# Altium PCB FinalPCB.PcbDoc (part 1 of 2)
Units mil, origin at the board's own origin, x right, y up, seen from the top; angles counter-clockwise.
Board outline 1128 x 1200 mil, 4 copper layers (Top Layer, Layer 1, Layer 2, Bottom Layer), stack 23.756 mil thick; 37 components, 46 nets, 236 pads, 59 vias.
Unrouted connection lines stored in the file: 12.
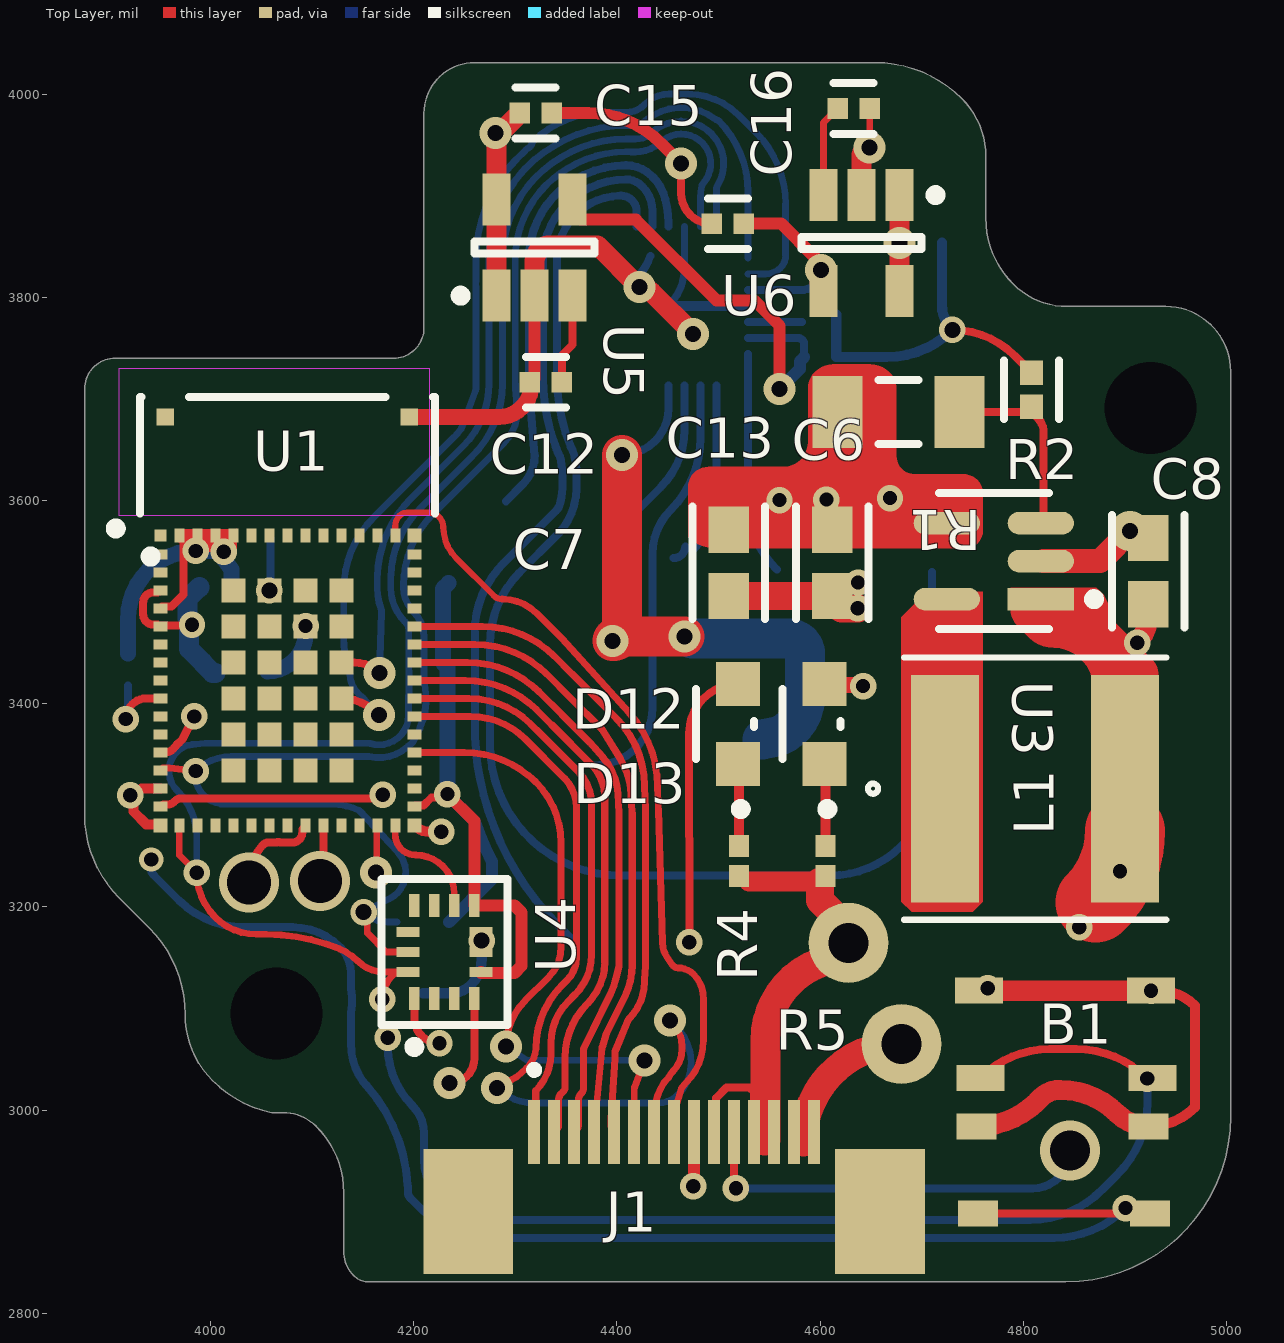
[diagram p0: Top Layer view]
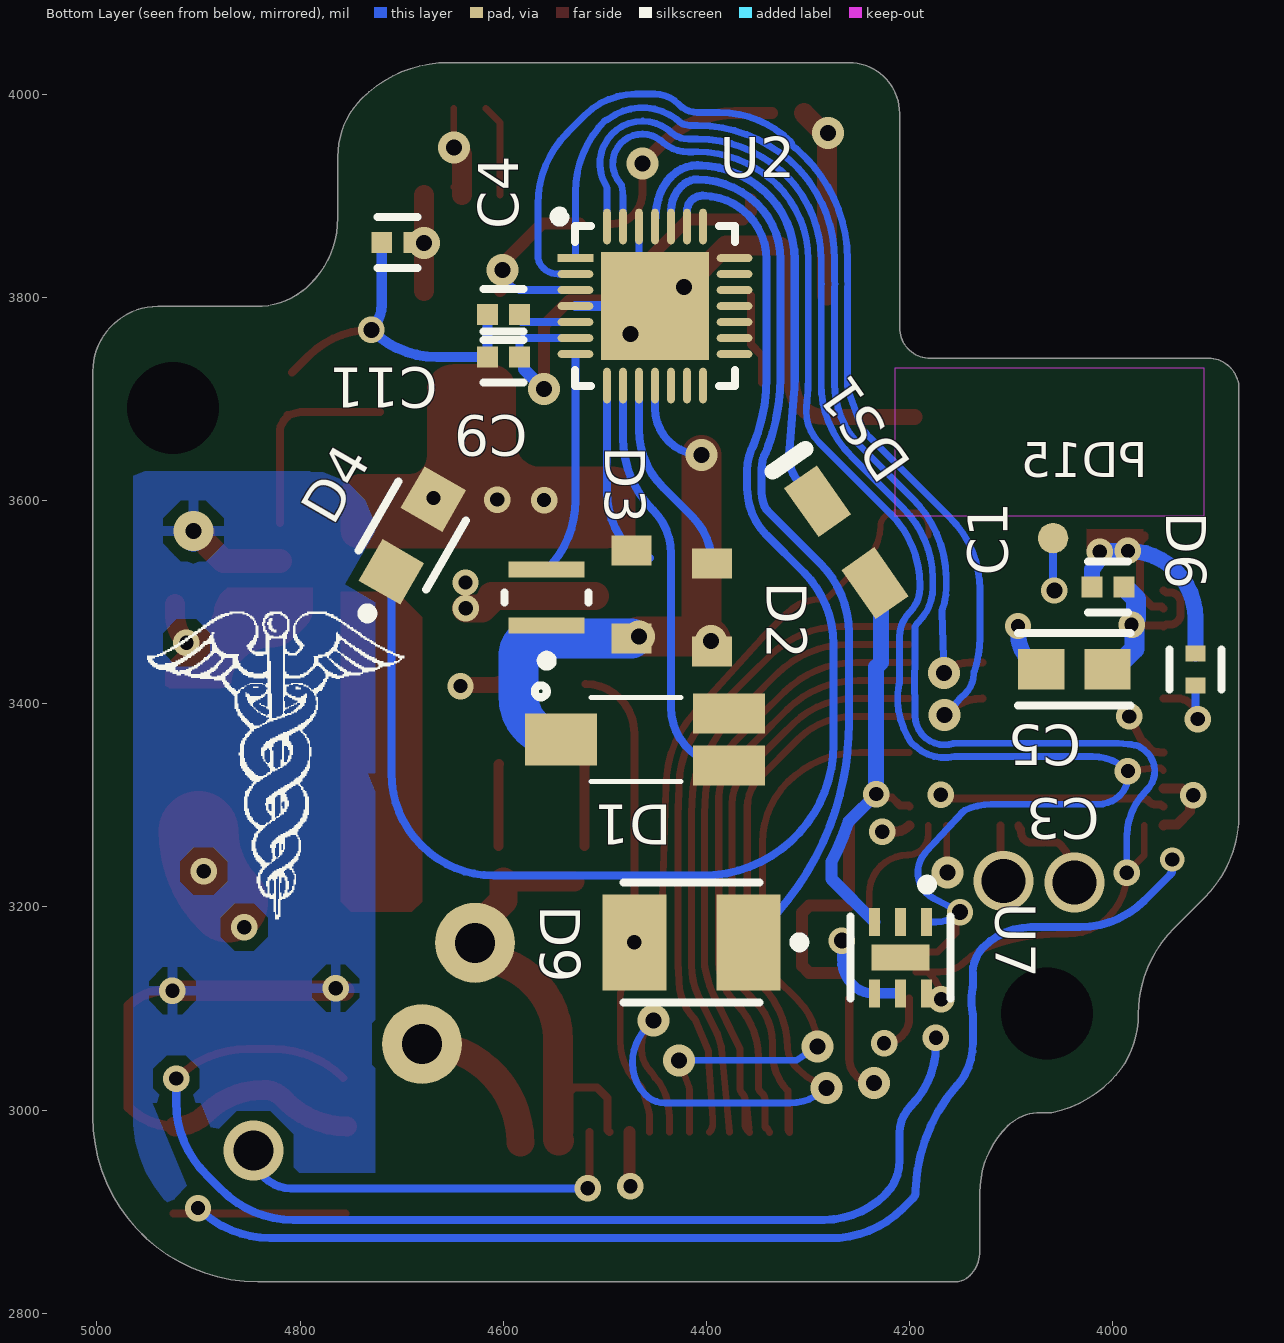
[diagram p1: Bottom Layer view, seen from below]
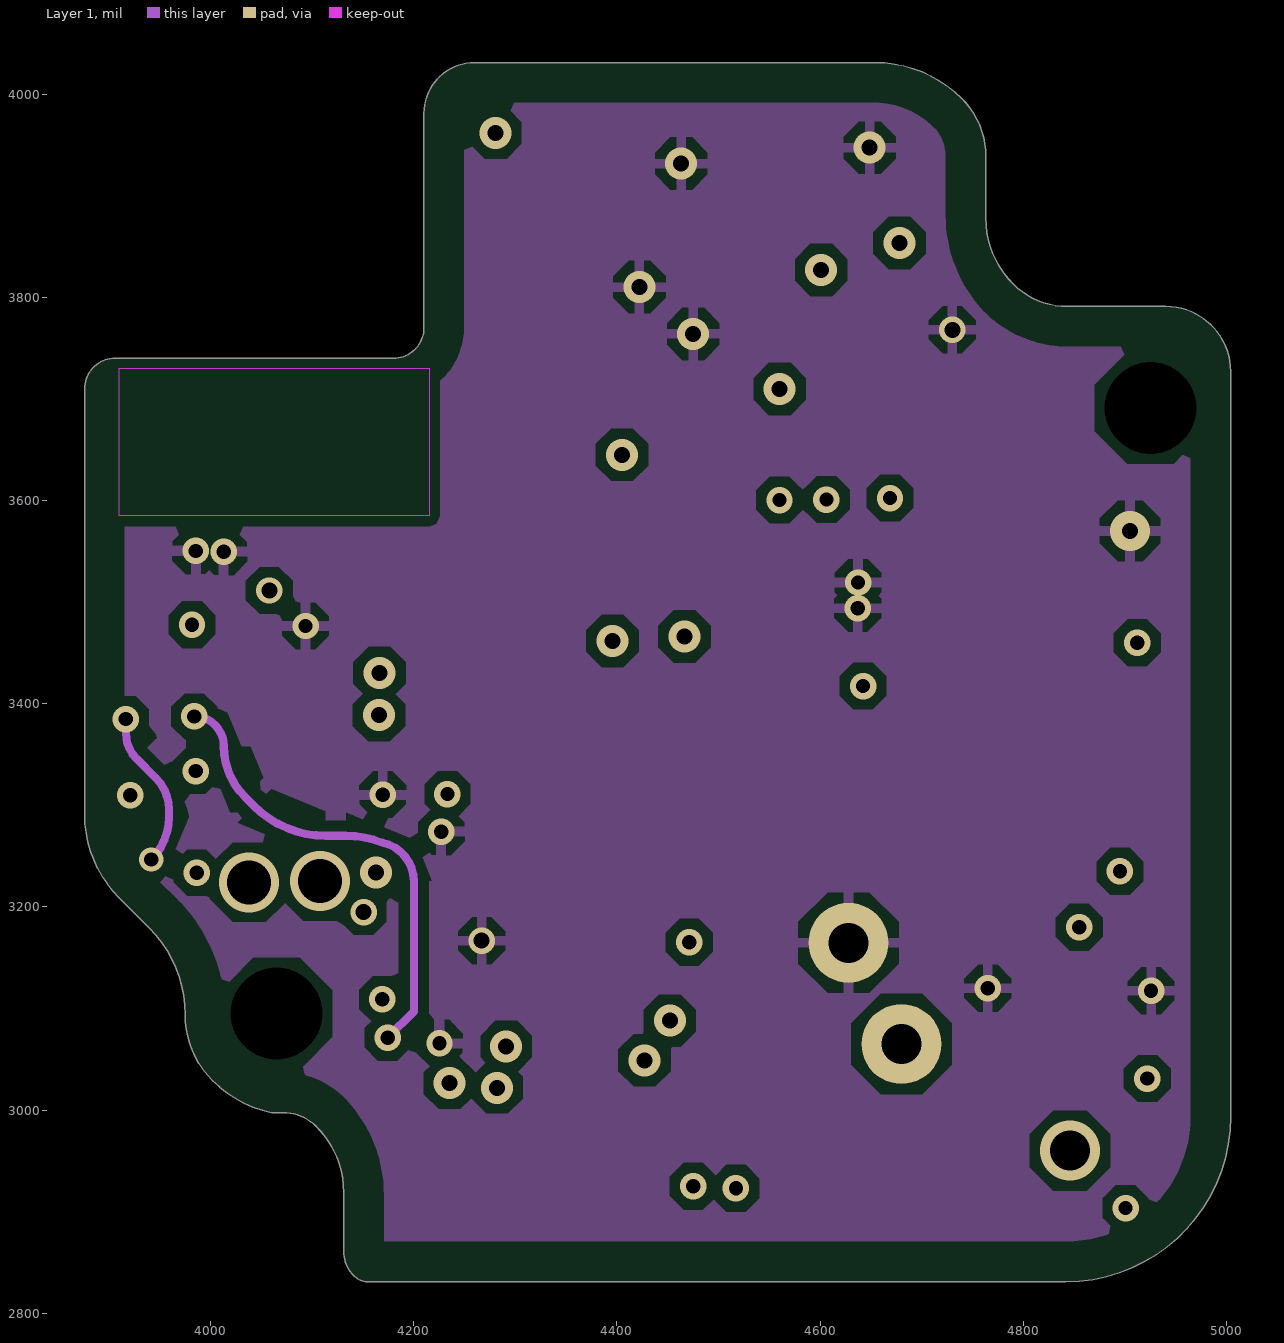
[diagram p2: Layer 1]
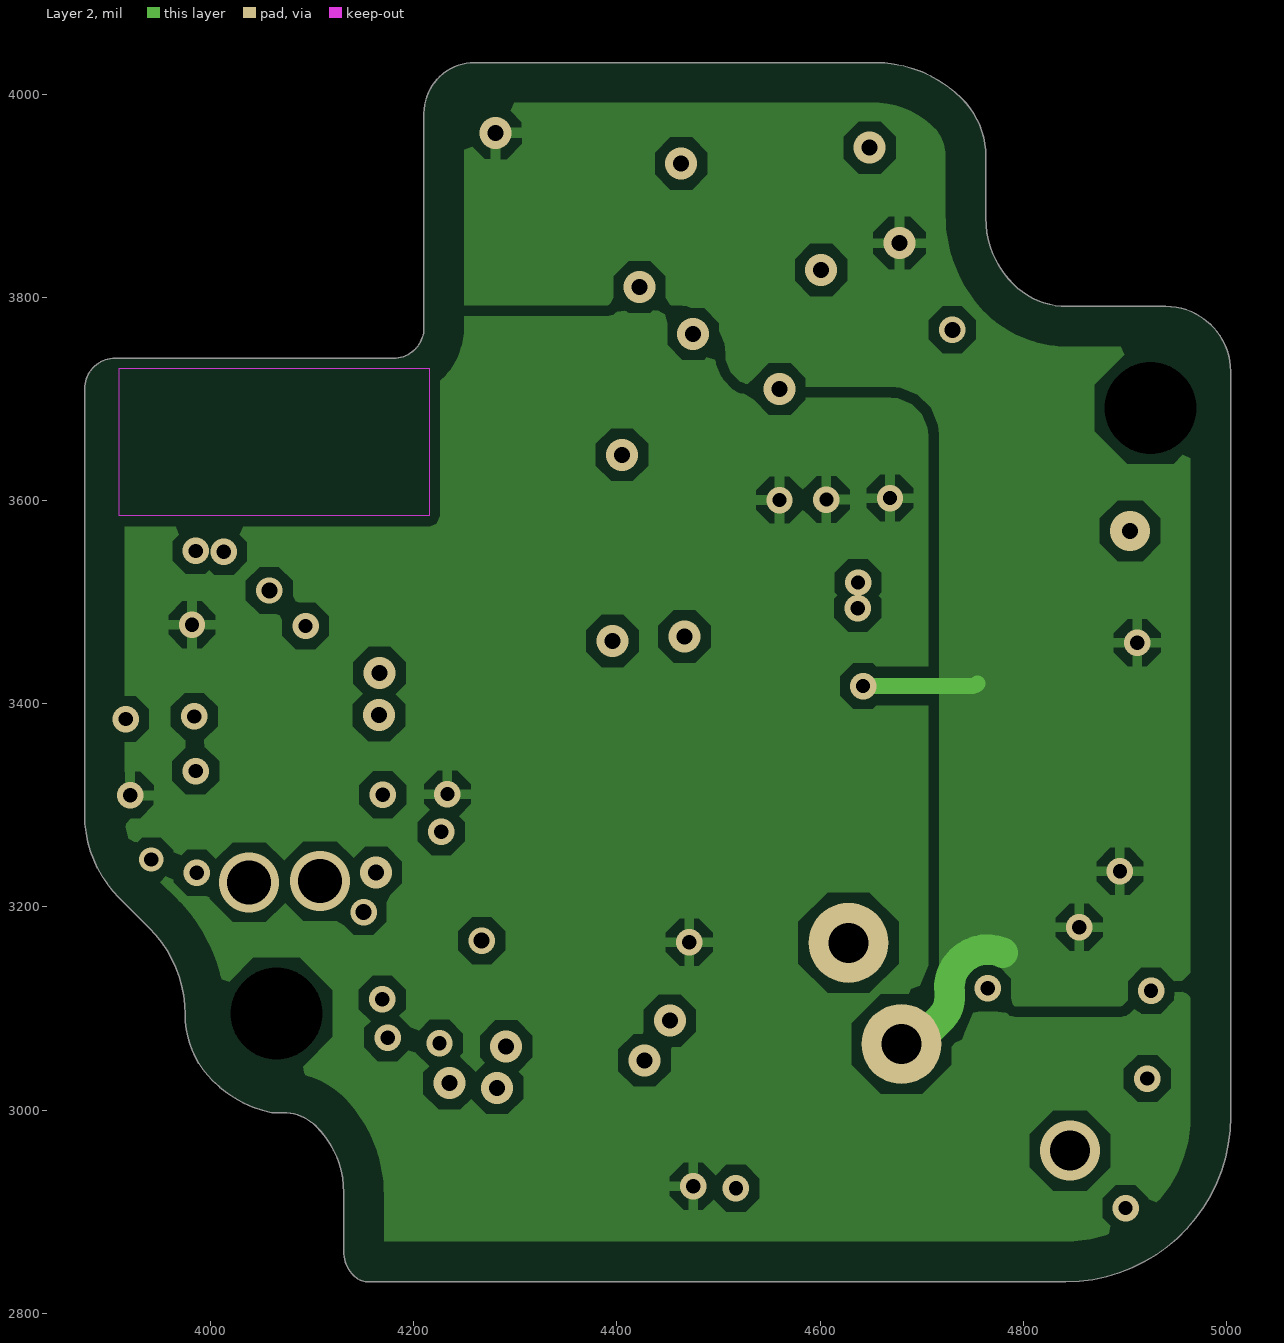
[diagram p3: Layer 2]
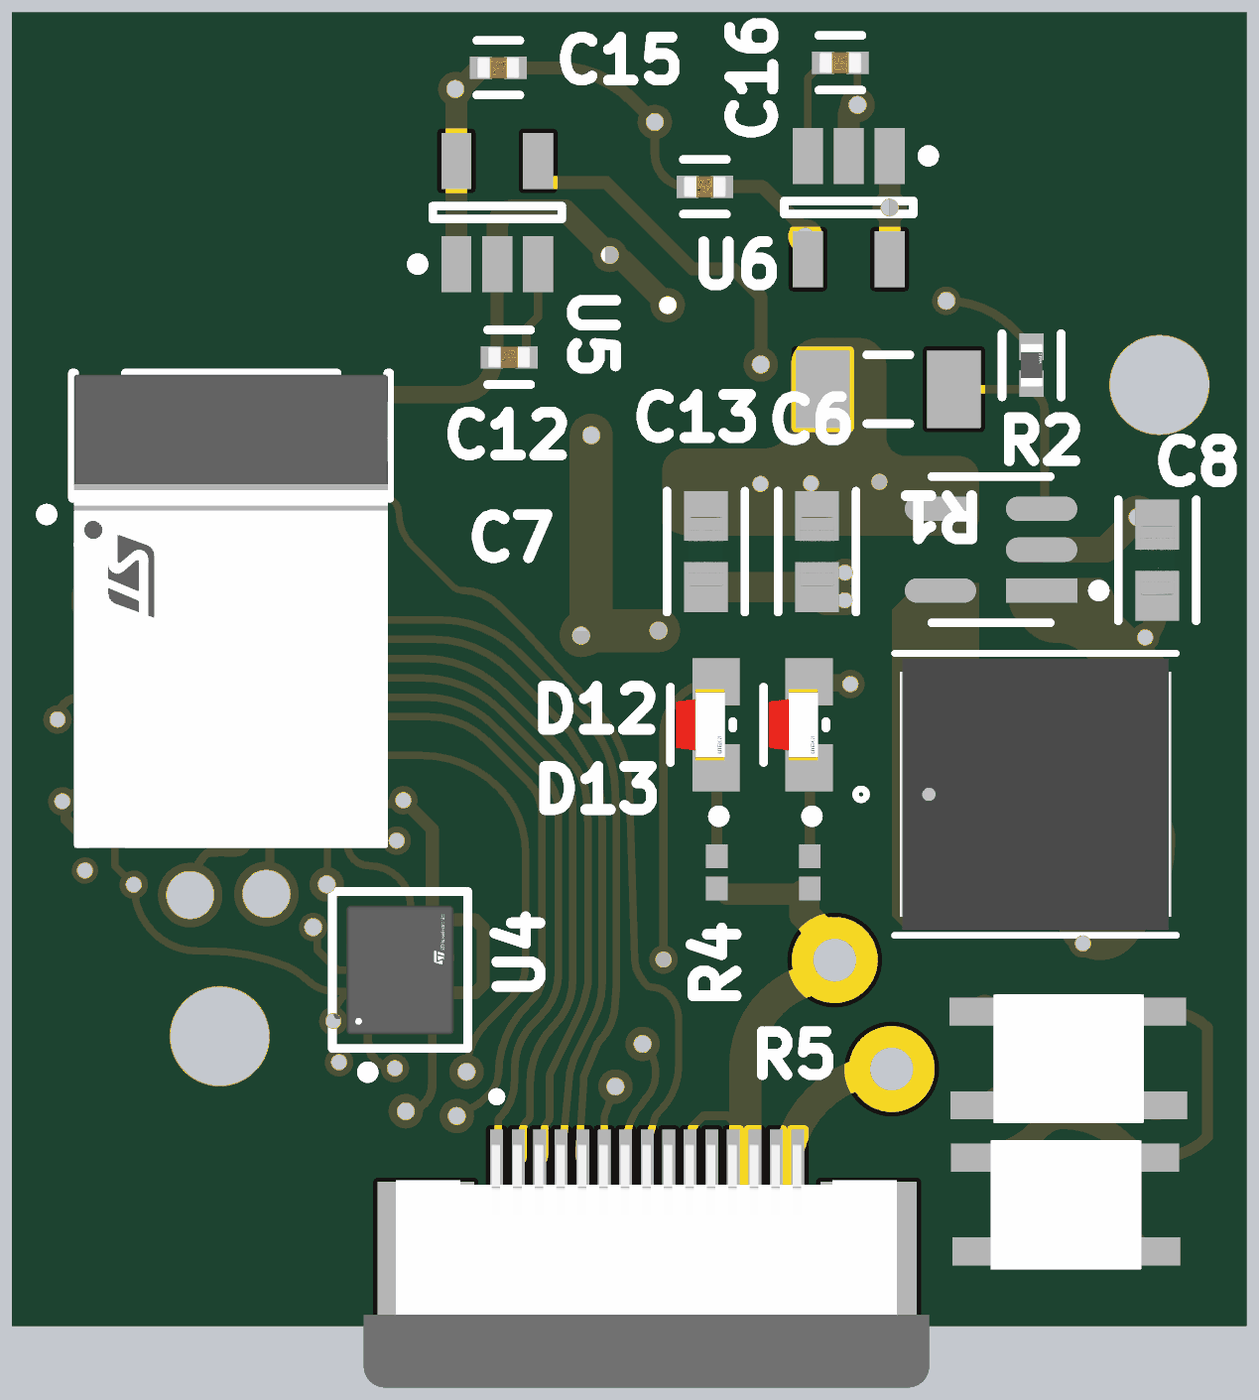
[diagram p5: 3D render of the assembled board from above, using the file's embedded part models]
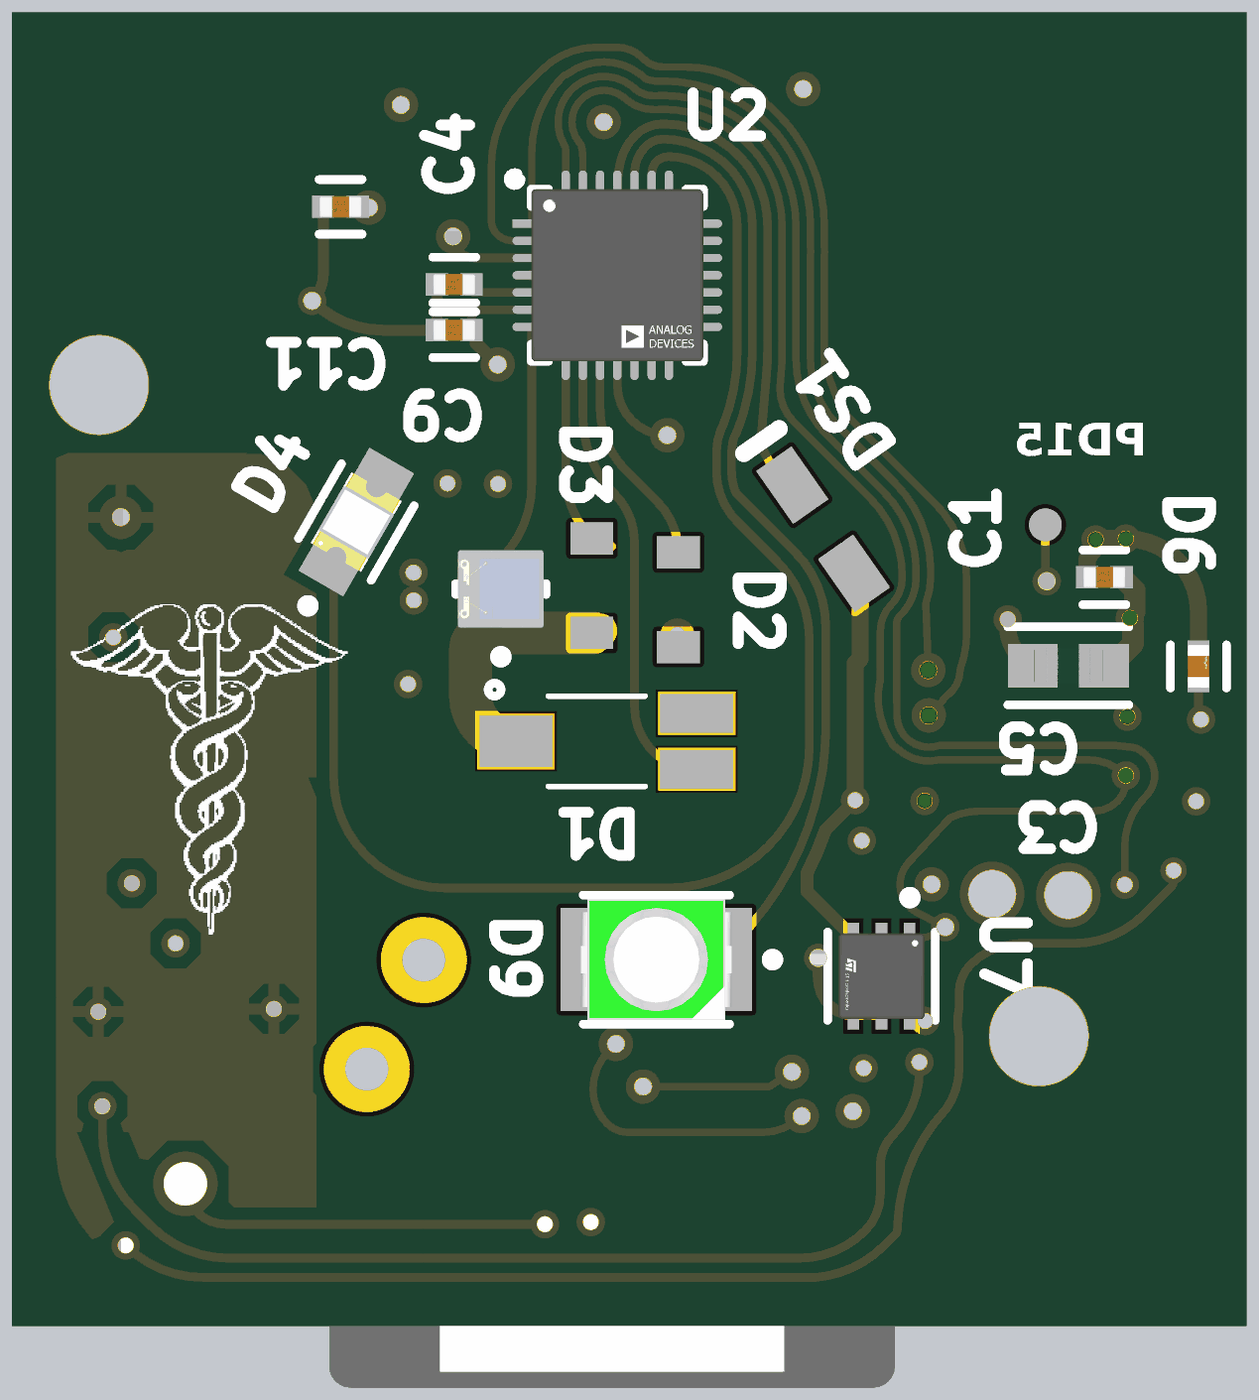
[diagram p6: 3D render of the assembled board from below, using the file's embedded part models]

## Layer stack, top to bottom
Top Solder: solder mask 0.4, Solder Resist, Dk 3.5
Top Layer: signal copper 1.4
Dielectric 2: prepreg 2.8, PP-006, Dk 4.1
Layer 1: signal copper 1.378
Dielectric 1: dielectric 12.6, FR-4, Dk 4.8
Layer 2: signal copper 1.378
Dielectric 3: prepreg 2.8, PP-006, Dk 4.1
Bottom Layer: signal copper 1.4
Bottom Solder: solder mask 0.4, Solder Resist, Dk 3.5

## Board outline
4071.41,2997.5 cw(c4071.41,2951.41) 4104,2984 cw(c4038.82,2918.82) 4131,2918.82 4131,2861.14 ccw(c4165.14,2861.14) 4141,2837 ccw(c4155.49,2851.49) 4155.49,2831 4841.58,2831 ccw(c4841.58,2993.42) 5004,2993.42 5004,3727 ccw(c4940,3727) 4940,3791 4843.11,3791 cw(c4843.11,3866.11) 4790,3813 cw(c4855.18,3878.18) 4763,3878.18 4763,3938.56 ccw(c4682.27,3938.56) 4739.36,3995.64 ccw(c4654,3910.29) 4654,4031 4260,4031 ccw(c4260,3981) 4210,3981 4210,3770 cw(c4180,3770) 4180,3740 3906,3740 ccw(c3906,3710) 3876,3710 3876,3291 ccw(c3991.88,3291) 3909.94,3209.06 3939.64,3179.36 cw(c3854.29,3094) 3975,3094 ccw(c4066.74,3094) 4001.87,3029.13 ccw(c4084.27,3111.53) 4060.26,2997.5

## Design rules (kind name [scope] priority, off if disabled: settings)
BoardOutlineClearance [All] p1: gap=39.37 ignorepadtopadclearanceinfootprint=FALSE
Clearance [All] p1: gap=10 ignorepadtopadclearanceinfootprint=FALSE except(0: Arc-Hole Track-Hole SMDPad-Hole THPad-Hole Via-Hole Fill-Hole Poly-Hole Region-Hole Text-Hole; 5.98: Arc-Arc Arc-Track Arc-SMDPad Track-Track Track-SMDPad; 6: SMDPad-SMDPad SMDPad-Fill SMDPad-Poly SMDPad-Region)
MinimumSolderMaskSliver [All] p1: minsoldermaskwidth=6
PolygonConnect [All] p1: connectstyle=Relief reliefconductorwidth=10 reliefentries=4 polygonreliefangle="90 Angle" airgapwidth=10
RoomDefinition Boost [InComponentClass('Boost')] p1: confinementstyle=ConfineIn formatcopy=TRUE lockcomponents=FALSE outline 3670,2275 6715,2275 6715,4290 3670,4290
RoomDefinition PPG [InComponentClass('PPG')] p2: confinementstyle=ConfineIn formatcopy=TRUE lockcomponents=FALSE outline 3350,2430 9235,2430 9235,3965 3350,3965
RoomDefinition Main [InComponentClass('Main')] p3: confinementstyle=ConfineIn formatcopy=TRUE lockcomponents=FALSE outline 3580,2420 6610,2420 6610,5210 3580,5210
RoutingVias [All] p1: holewidth=28 width=50 viastyle="Through Hole" minholewidth=28 minwidth=50 maxholewidth=28 maxwidth=50
SolderMaskExpansion [All] p1: expansion=4 istentingtop=FALSE
Width [All] p1: maxlimit=196.85 minlimit=5.98 preferedwidth=10
29 further rules are at their usual default settings.

## Classes and differential pairs
component class Boost: C6 C7 C8 L1 R1 R2 U3
component class PPG: C4 C9 C11 C12 C13 C15 C16 D1 D2 D3 D4 D6 D9 D12 D13 DS1 R4 R5 U5 U6
component class Main: B1 C1 C3 C5 J1 U1 U4 U7

## Components (designator, comment, footprint, x,y, rotation, side; value= is the part's Value field where it differs from the comment)
B1 "TS3425PA" TS3425PA#1 4789.43,3147.58 r90 top
B2 "TS3425PA" TS3425PA#2 4787,3014 r90 top
C1 "GRM155R71C104KA88J" FP-GRM155-0_05-MFG 3918.87,3433.46 r90 bottom value=100nF
C3 "CL10A106MA8NRNC" FP-CL10-IPC_A 4038,3434 r0 bottom
C4 "C0402C104K3RACTU" FP-C0402-BB-MFG 4600,3783 r0 bottom value="0.10 μF"
C5 "C0402C104K3RACTU" FP-C0402-BB-MFG 4005,3515 r0 bottom value="0.10 μF"
C6 "CL10A106MA8NRNC" FP-CL10-IPC_A 4510,3538.52 r270 top
C7 "CL10A106MA8NRNC" FP-CL10-IPC_A 4611.67,3538.52 r270 top
C8 "CL10A106MA8NRNC" FP-CL10-IPC_A 4923,3530.6 r90 top
C9 "C0402C104K3RACTU" FP-C0402-BB-MFG 4600.01,3741.15 r0 bottom value="0.10 μF"
C11 "C0402C104K3RACTU" FP-C0402-BB-MFG 4704,3854 r0 bottom value="0.10 μF"
C12 "C0402C104K3RACTU" FP-C0402-BB-MFG 4329.9,3716.38 r180 top value="0.10 μF"
C13 "C0402C104K3RACTU" FP-C0402-BB-MFG 4509.02,3872.32 r180 top value="0.10 μF"
C15 "C0402C104K3RACTU" FP-C0402-BB-MFG 4320,3981.28 r0 top value="0.10 μF"
C16 "C0402C104K3RACTU" FP-C0402-BB-MFG 4633,3985.81 r0 top value="0.10 μF"
D1 "SFH 2704" FP-SFH_2704-MFG 4557.31,3504.32 r0 bottom
D2 "SFH 2716 A01" "SFH 2716 A01" 4394.85,3494.54 r270 bottom
D3 "SFH 2400 FA" "SFH 2400 FA" 4457.38,3374.95 r180 bottom
D4 "LS R976-NR-1" FP-LS_R976-MFG 4689.6,3565.57 r120 bottom
D6 "SFH 2716 A01" "SFH 2716 A01" 4474.05,3507.37 r270 bottom
D9 "150141GS73100" WL-SMTW_3528 4415,3165.17 r0 bottom
D12 "LTST-S270KRKT" FP-LTST-S270KRKT-MFG 4510,3380 r90 top
D13 "LTST-S270KRKT" FP-LTST-S270KRKT-MFG 4595.21,3380 r90 top
DS1 "LTST-S220KGKT" LTST-S220KGKT_V 4262.38,3559 r55 bottom
J1 "ZF5S-15-01-T-WT" ZF5S-15-01-T-WT 4444.47,2877.25 r0 top
L1 "SWPA6028S100MT" SWPA6028S100MT 4811.58,3316.39 r0 top value=10uH
R1 "RC1206FR-07100KL" RESC3116X65X40ML10T20 4676.9,3687.09 r180 top
R2 "AC0402FR-07160KL" FP-AC0402-IPC_B 4808,3709 r90 top
R4 "RK73H1ETTP1001F" RESC1005X40X25LL10T10 4520,3245 r90 top value=1kR
R5 "RK73H1ETTP1001F" RESC1005X40X25LL10T10 4605,3245 r90 top value=1kR
U1 "STM32WB5MMGH6TR" STM32WB5MMGH6TR 3955.38,3682.12 r0 top
U2 "ADPD1080WBCPZR7" ADPD1080WBCPZR7 4450.73,3791.4 r180 bottom
U3 "MAX1722EZK+T" FP-Z5-1-IPC_A 4770.9,3540.28 r180 top
U4 "LSM6DSLTR" FP-LGA-14L-DM00249496-MFG 4230.05,3155.66 r90 top
U5 "LK112SM18TR" SOT23-5L_M 4318.98,3848.83 r90 top
U6 "LK112SM18TR" SOT23-5L_M 4640.69,3853.36 r270 top
U7 "STTS22HTR" FP-UDFN-6L-DM00423052-MFG 4209,3150 r270 bottom

## Footprints (in the part's own frame and the unit in brackets; to place one, negate y for a bottom-side part, rotate by r counter-clockwise, add the part's x,y. Pads: shape width x height; smd on the part's side, far side on the other; paste and mask are expansions set on the pad)
ADPD1080WBCPZR7 [mm]
  rect 0.894x0.192 smd paste+0 mask+0: 1(-1.989,1.2)
  rrect100% 0.894x0.192 smd paste+0 mask+0: 2(-1.989,0.8) 3(-1.989,0.4) 4(-1.989,0) 5(-1.989,-0.4) 6(-1.989,-0.8) 7(-1.989,-1.2) 15(1.989,-1.2) 16(1.989,-0.8) 17(1.989,-0.4) 18(1.989,0) 19(1.989,0.4) 20(1.989,0.8) 21(1.989,1.2)
  rrect100% 0.192x0.894 smd paste+0 mask+0: 8(-1.2,-1.989) 9(-0.8,-1.989) 10(-0.4,-1.989) 11(0,-1.989) 12(0.4,-1.989) 13(0.8,-1.989) 14(1.2,-1.989) 22(1.2,1.989) 23(0.8,1.989) 24(0.4,1.989) 25(0,1.989) 26(-0.4,1.989) 28(-1.2,1.989) ""(-0.8,1.989)
  rect 2.7x2.7 smd paste-1000 mask+0: 29(0,0)
  silkscreen extent -2.51,-2 2,2.36, body extent -2,-2 2,2, height 0.8
FP-AC0402-IPC_B [mil]
  rect 24.23x22.54 smd paste+0 mask+0: 1(-16.87,0) 2(16.87,0)
  silkscreen extent -29,-27 29,27, body extent -35,-17 35,17, height 10
FP-C0402-BB-MFG [mm]
  rect 0.52x0.52 smd paste+0 mask+0: 1(-0.4,0) 2(0.4,0)
  silkscreen extent -0.5,-0.64 0.5,0.64, body extent -0.5,-0.25 0.5,0.25, height 0.55
FP-CL10-IPC_A [mil]
  rect 45.6x39.85 smd paste+0 mask+0: 1(-32.56,0) 2(32.56,0)
  silkscreen extent -55,-36 55,36, body extent -31,-16 31,16, height 36
FP-GRM155-0_05-MFG [mm]
  rect 0.4x0.5 smd paste+0 mask+0: 1(-0.4,0) 2(0.4,0)
  silkscreen extent -0.5,-0.65 0.5,0.65, body extent -0.5,-0.25 0.5,0.25, height 0.55
FP-LGA-14L-DM00249496-MFG [mm]
  rect 0.575x0.254 smd paste+0 mask+0: 1(-1.162,0.75) 2(-1.163,0.25) 3(-1.162,-0.25) 4(-1.162,-0.75) 8(1.162,-0.75) 9(1.163,-0.25) 10(1.162,0.25) 11(1.162,0.75)
  rect 0.254x0.575 smd paste+0 mask+0: 5(-0.5,-0.913) 6(0,-0.913) 7(0.5,-0.912) 12(0.5,0.913) 13(0,0.913) 14(-0.5,0.912)
  silkscreen extent -2.5,-1.58 1.83,1.58, body extent -1.5,-1.25 1.5,1.25, height 0.86
FP-LS_R976-MFG [mm]
  rect 1.2x1.2 smd paste+0 mask+0: 1(-1.05,0) 2(1.05,0)
  silkscreen extent -2.37,-0.97 1,0.97, body extent -0.95,-0.68 0.95,0.68, height 0.9
FP-LTST-S270KRKT-MFG [mm]
  rect 1.1x1.1 smd paste+0 mask+0: 1(-1,-0.235) 2(1,-0.235)
  silkscreen extent -2.25,-0.63 0.87,0.82, body extent -1.65,-0.88 1.65,0.72, height 0.25
FP-SFH_2704-MFG [mm]
  rect 1.9x0.4 smd paste-1000 mask+0: 1(0,0.7) 2(0,-0.7)
  silkscreen extent -1.05,-0.13 1.05,1.7, body extent -1,-0.9 1,0.9, height 0.6
FP-UDFN-6L-DM00423052-MFG [mm]
  rect 0.7x0.27 smd paste+0 mask-1000: 1(-0.89,0.65) 2(-0.89,0) 3(-0.89,-0.65) 4(0.89,-0.65) 5(0.89,0) 6(0.89,0.65)
  rect 0.65x1.45 smd paste+0 mask-1000: 7(0,0)
  silkscreen extent -1.95,-1.25 1.02,1.25, body extent -1,-1 1,1, height 0.55
FP-Z5-1-IPC_A [mm]
  rect 1.657x0.566 smd paste+0 mask+0: 1(-1.176,0.95)
  rrect100% 1.657x0.566 smd paste+0 mask+0: 2(-1.176,0) 3(-1.176,-0.95) 4(1.176,-0.95) 5(1.176,0.95)
  silkscreen extent -2.63,-1.7 1.38,1.7
LTST-S220KGKT_V [mm] "SMD, 2-Leads, Body 2.15x0.6mm"
  rect 1.5x1 smd: 1(-1.25,0) 2(1.25,0)
  silkscreen extent 2.5,-0.5 2.5,0.5, body extent -1.05,-0.3 1.05,0.3, height 1.1
RESC1005X40X25LL10T10 [mm] "Chip Resistor, 2-Leads, Body 1.00x0.50mm, IPC High Density"
  rect 0.55x0.5 smd mask+0: 1(-0.375,0) 2(0.375,0)
  body extent -0.55,-0.3 0.55,0.3, height 0.4
RESC3116X65X40ML10T20 [mm] "Chip Resistor, 2-Leads, Body 3.10x1.60mm, IPC Low Density"
  rect 1.25x1.8 smd: 1(-1.525,0) 2(1.525,0)
  silkscreen extent -0.5,-0.8 0.5,0.8, body extent -1.6,-0.85 1.6,0.85, height 0.65
"SFH 2400 FA" [mm]
  rect 1.8x1.3 smd paste-2 mask+0: 1(-2.184,-0.254)
  rect 1.8x1 smd paste-2 mask+0: 2(2.016,0.396) 3(2.016,-0.904)
  silkscreen extent -2.83,-1.3 0.82,1.1
"SFH 2716 A01" [mm]
  rect 0.75x1 smd: A(-1.1,0) K(1.1,0)
SOT23-5L_M [mm] "SOT23, 5-Leads, Body 2.9x1.6mm, Pitch 0.95mm, Lead Span 2.8mm, IPC Low Density"
  rect 1.3x0.7 smd mask+0: 1(-1.2,0.95) 2(-1.2,0) 3(-1.2,-0.95)
  rect 1.3x0.7 smd: 4(1.2,-0.95) 5(1.2,0.95)
  silkscreen extent -1.32,-1.5 0.15,1.97, body extent -0.87,-1.5 0.87,1.5, height 1.45
STM32WB5MMGH6TR [mm]
  rect 0.3x0.3 smd paste+0 mask+0: 1(-0.125,-2.96)
  rect 0.35x0.25 smd paste+0 mask+0: 2(-0.125,-3.435) 3(-0.125,-3.885) 4(-0.125,-4.335) 5(-0.125,-4.785) 6(-0.125,-5.235) 7(-0.125,-5.685) 8(-0.125,-6.135) 9(-0.125,-6.585) 10(-0.125,-7.035) 11(-0.125,-7.485) 12(-0.125,-7.935) 13(-0.125,-8.385) 14(-0.125,-8.835) 15(-0.125,-9.285) 16(-0.125,-9.735) 32(6.225,-9.735) 33(6.225,-9.285) 34(6.225,-8.835) 35(6.225,-8.385) 36(6.225,-7.935) 37(6.225,-7.485) 38(6.225,-7.035) 39(6.225,-6.585) 40(6.225,-6.135) 41(6.225,-5.685) 42(6.225,-5.235) 43(6.225,-4.785) 44(6.225,-4.335) 45(6.225,-3.885) 46(6.225,-3.435)
  rect 0.35x0.35 smd paste+0 mask+0: 17(-0.125,-10.21) 31(6.225,-10.21) 47(6.225,-2.96)
  rect 0.25x0.35 smd paste+0 mask+0: 18(0.35,-10.21) 19(0.8,-10.21) 20(1.25,-10.21) 21(1.7,-10.21) 22(2.15,-10.21) 23(2.6,-10.21) 24(3.05,-10.21) 25(3.5,-10.21) 26(3.95,-10.21) 27(4.4,-10.21) 28(4.85,-10.21) 29(5.3,-10.21) 30(5.75,-10.21) 48(5.75,-2.96) 49(5.3,-2.96) 50(4.85,-2.96) 51(4.4,-2.96) 52(3.95,-2.96) 53(3.5,-2.96) 54(3.05,-2.96) 55(2.6,-2.96) 56(2.15,-2.96) 57(1.7,-2.96) 58(1.25,-2.96) 59(0.8,-2.96) 60(0.35,-2.96)
  rect 0.6x0.6 smd paste+0 mask+0: 61(1.7,-4.335) 62(1.7,-5.235) 63(1.7,-6.135) 64(1.7,-7.035) 65(1.7,-7.935) 66(1.7,-8.835) 67(2.6,-8.835) 68(3.5,-8.835) 69(4.4,-8.835) 70(4.4,-7.935) 71(4.4,-7.035) 72(4.4,-6.135) 73(4.4,-5.235) 74(4.4,-4.335) 75(3.5,-4.335) 76(2.6,-4.335) 77(2.6,-5.235) 78(2.6,-6.135) 79(2.6,-7.035) 80(2.6,-7.935) 81(3.5,-7.935) 82(3.5,-7.035) 83(3.5,-6.135) 84(3.5,-5.235)
  rect 0.43x0.43 smd paste+0 mask+0: 85(0,0) 86(6.1,0)
  silkscreen extent -1.36,-2.91 6.74,0.5, body extent -1.14,-11.07 7.24,1, height 0.25
SWPA6028S100MT [mil]
  rect 67x224 smd paste+0 mask+0: 1(-88.58,0) 2(88.58,0)
  silkscreen extent -165,-129 129,129, body extent -124,-124 124,124, height 110
TS3425PA#1 [mm]
  rect 0.65x1.2 smd paste+0 mask+0: 1(-0.764,0.838) 2(-0.764,-3.462) 3(-2.944,0.808) 4(-2.944,-3.492)
  body extent -3.36,-3.09 -0.36,0.41, height 1.87
TS3425PA#2 [mm]
  rect 0.65x1 smd paste+0 mask+0: 1(-0.764,0.838) 2(-0.764,-3.462) 3(-2.944,0.808) 4(-2.944,-3.492)
  body extent -3.36,-3.09 -0.36,0.41, height 1.87
WL-SMTW_3528 [mm] "SMD Mono-color TOP LED, body 3.2x2.8mm"
  rect 1.6x2.4 smd: 1(-1.425,0) 2(1.425,0)
  silkscreen extent -2.82,-1.5 1.7,1.5, body extent -1.75,-1.4 1.75,1.4, height 1.9
ZF5S-15-01-T-WT [mm]
  rect 0.3x1.6 smd: 01(-3.2,2.565) 02(-2.7,2.565) 03(-2.2,2.565) 04(-1.7,2.565) 05(-1.2,2.565) 06(-0.7,2.565) 07(-0.2,2.565) 08(0.3,2.565) 09(0.8,2.565) 10(1.3,2.565) 11(1.8,2.565) 12(2.3,2.565) 13(2.8,2.565) 14(3.3,2.565) 15(3.8,2.565)
  rect 2.24x3.12 smd: S1(-4.847,0.585) S2(5.447,0.585)
  silkscreen extent -3.3,4.03 -3.1,4.23, body extent -6.29,-2.64 6.86,3.03, height 2.11

## Part data
C1: library part CMP-2008-03928-2, Capacitance=100nF, Case Code (Imperial)=0402, Case Code (Metric)=1005, Dielectric=X7R, Manufacturer=Murata, Manufacturer Lifecycle Status=NRND, Max Operating Temperature=125°C, Min Operating Temperature=-55°C, Package Quantity=1, Supplier Part Number=490-6328-1-ND, Tolerance=10%, Voltage=16V, Case/Package=0402, Category="Ceramic Capacitors", ComponentLink1Description=https://datasheet.ciiva.com/6271/product-6271168.pdf?src-supplier=Digikey, ComponentLink1URL=https://datasheet.ciiva.com/6271/product-6271168.pdf?src-supplier=Digikey, ComponentLink2Description=https://datasheet.ciiva.com/6271/grm155r71c104ka88-01-6271231.pdf?src-supplier=Digikey, ComponentLink2URL=https://datasheet.ciiva.com/6271/grm155r71c104ka88-01-6271231.pdf?src-supplier=Digikey, Construction=Flat, Depth=500µm, Height=550µm, Lead Free="Lead Free", Length=1mm, Manufacturer Part Number=GRM155R71C104KA88J, Material=Ceramic, Mount="Surface Mount", Mounting Technology="Surface Mount", NexarPartId=9223238, Number of Pins=2, Packaging="Cut Tape", Pins=2NUMBER, Pricing="1=0.08, 10=0.009, 50=0.0072, 100=0.0056, 500=0.0052, 1000=0.0048, 2500=0.004 (USD)", Radiation Hardening=No, REACH SVHC="No SVHC", Reach SVHC Compliant=No, RoHS=Compliant, RoHS Compliant=Yes, Schedule B="8532240020, 8532240020", Series=GRM, Stock=17752595, Supplier=Digikey, Termination=SMD/SMT, Thickness=500µm, Voltage Rating=16V, Voltage Rating (DC)=16V, Width=500µm
C3 C6 C7 C8: library part CMP-13271-004224-1, "Cap Ceramic 10uF 25V X5R ±20% Pad SMD 0603 +85°C T/R", Capacitance=10uF, Case Code (Imperial)=0603, Case Code (Metric)=1608, Dielectric=X5R, Max Operating Temperature=85°C, Min Operating Temperature=-55°C, Package Quantity=1, Tolerance=20%, Voltage Rating=25V, Case/Package=0603, Contact Plating=Tin, Lead Free="Lead Free", Length=0.063inch, Mount="Surface Mount", Packaging="Tape and Reel", Termination=Wraparound, Thickness=0.035inch, Width=0.031inch
C4 C5 C9 C11 C12 C13 C15 C16: library part CMP-03020-012858-1, "Cap Ceramic 0.1uF 25V X7R 10% Pad SMD 0402 125C T/R", Capacitance="0.10 μF", Case Code (Imperial)=0402, Case Code (Metric)=1005, Dielectric=X7R, Dielectric Material=4241ConductorMaterial, Manufacturer=Kemet, Max Operating Temperature=125°C, Min Operating Temperature=-55°C, Package=C0402-BB, Supplier Part Number=399-14148-1-ND, Temperature="-55°C to +125°C", Temperature Coefficient=15%, Temperature Range High=+125°C, Tolerance=0.1, Voltage Rating="25 V", Voltage Rating (DC)=25V, Automotive=No, Case/Package=0402, Category=Cap, ComponentLink1Description=http://www.farnell.com/datasheets/2746129.pdf?src-supplier=Farnell, ComponentLink1URL=http://www.farnell.com/datasheets/2746129.pdf?src-supplier=Farnell, ComponentLink2Description=Datasheet, ComponentLink2URL=https://content.kemet.com/datasheets/KEM_C1002_X7R_SMD.pdf, ComponentLink3Description=http://www.farnell.com/datasheets/2746129.pdf?src-supplier=Newark, ComponentLink3URL=http://www.farnell.com/datasheets/2746129.pdf?src-supplier=Newark, ComponentLink4Description=http://www.farnell.com/datasheets/2746129.pdf?src-supplier=Element14, ComponentLink4URL=http://www.farnell.com/datasheets/2746129.pdf?src-supplier=Element14, ComponentLink5Description=https://datasheet.octopart.com/C0402C104K3RACTU-Kemet-datasheet-62095741.pdf?src-supplier=Element14, ComponentLink5URL=https://datasheet.octopart.com/C0402C104K3RACTU-Kemet-datasheet-62095741.pdf?src-supplier=Element14, ComponentLink6Description=https://api.kemet.com/component-edge/download/datasheet/C0402C104K3RAC7867.pdf?src-supplier=Digikey, ComponentLink6URL=https://api.kemet.com/component-edge/download/datasheet/C0402C104K3RAC7867.pdf?src-supplier=Digikey, ComponentLink7Description=https://datasheet.octopart.com/C0402C104K3RACTU-KEMET-datasheet-176289272.pdf?src-supplier=Newark, ComponentLink7URL=https://datasheet.octopart.com/C0402C104K3RACTU-KEMET-datasheet-176289272.pdf?src-supplier=Newark, ComponentLink8Description=https://datasheet.octopart.com/C0402C104K3RACTU-KEMET-datasheet-157246124.pdf?src-supplier=Electro+Sonic, ComponentLink8URL=https://datasheet.octopart.com/C0402C104K3RACTU-KEMET-datasheet-157246124.pdf?src-supplier=Electro+Sonic, Device Class L1="Passive Components", Device Class L2=Capacitors, Device Class L3="Ceramic Capacitors", Digikey Description="Cap Ceramic 0.1uF 25V X7R 10% Pad SMD 0402 125C T/R", Height=0.55mm, Ipc Land Pattern Name=CAPC10050X50, Lead Free=Yes, Manufacturer Part Number=C0402C104K3RACTU, Material=Ceramic, Mouser Description="Cap Ceramic 0.1uF 25V X7R 10% Pad SMD 0402 125C T/R", Octopart=https://octopart.com/c0402c104k3ractu-kemet-71105629, Packaging="Cut Tape", Pins=2NUMBER, Pricing="1=0.16, 10=0.095, 100=0.0611, 1000=0.04279, 2500=0.03794, 5000=0.0349 (USD)", Reach SVHC Compliant=No, RoHS=TRUE, RoHS Compliant=Yes, Stock=453452, Supplier=Digikey, Temperature Characteristic=X7R, Temperature Range Low=-55°C
D1: library part CMP-62027-000006-1, "SENSOR PHOTODIODE 900NM 2SMD", Case/Package=SMD/SMT, Dark Current=100pA, Manufacturer="Osram Opto", Max Operating Temperature=85°C, Max Reverse Voltage (DC)=6V, Min Operating Temperature=-40°C, Supplier Part Number=475-SFH2704CT-ND, Category=Photodiodes, ComponentLink1Description=https://media.digikey.com/pdf/Data%20Sheets/Osram%20PDFs/SFH_2704_v0.0_9-12-18.pdf?src-supplier=Digikey, ComponentLink1URL=https://media.digikey.com/pdf/Data%20Sheets/Osram%20PDFs/SFH_2704_v0.0_9-12-18.pdf?src-supplier=Digikey, ComponentLink2Description=http://datasheet.octopart.com/SFH-2704-Osram-Opto-datasheet-142374394.pdf?src-supplier=Rs, ComponentLink2URL=http://datasheet.octopart.com/SFH-2704-Osram-Opto-datasheet-142374394.pdf?src-supplier=Rs, Diode Type=PIN, Manufacturer Part Number="SFH 2704", Mounting Technology="Surface Mount", Packaging="Cut Tape", Pricing="1=0.83, 10=0.576, 100=0.4218, 500=0.35302, 1000=0.33048 (USD)", Response Time=67ns, RoHS=Yes, RoHS Compliant=Yes, Series=CHipLED, Stock=4566, Supplier=Digikey, Viewing Angle=120°, Wavelength=900nm
D2 D6: "Silicon PIN Photodiode with Vλ Characteristics, -40 to 100 °C, 1.3 x 2 x 0.8 mm", Manufacturer="Osram Opto", Supplier Part Number=475-SFH2716A01CT-ND, Supplier Part Number 1=475-SFH2716A01DKR-ND, Category=Phototransistor, Manufacturer Part Number="SFH 2716 A01", Pricing="1=1.01, 10=0.615, 100=0.4162, 500=0.33804, 1000=0.31406 (USD)", RoHS=Yes, Stock=7067, Supplier=DigiKey, Supplier 1=Digikey
D4: library part CMP-62016-000037-1, "LED RED DIFFUSED 0805 SMD", Case Code (Imperial)=0805, Case Code (Metric)=2012, Color=Red, Forward Current=25mA, Forward Voltage=2.5V, Lens Color=White, Max Operating Temperature=85°C, Min Operating Temperature=-30°C, Package Quantity=16000, Power Dissipation=65W, Reverse Voltage=12V, Test Current=20mA, Case/Package=0805, Depth=1.35mm, Dominant Wavelength=633nm, Height=0.9mm, Illumination Color=Red, Length=2mm, Lens Size=1.25mm, Lens Style=Flat, Lens Transparency=Diffused, Luminous Flux=0.47lm, Luminous Intensity=180mcd, Mount="Surface Mount", Number of Elements=1, Number of LEDs=1, Number of Pins=2, Packaging="Tape and Reel", Radiation Hardening=No, Viewing Angle=160°, Width=1.25mm
D9: library part CMP-1429-00004-2, Case Code (Imperial)=1411, Case Code (Metric)=3528, Color=Green, Forward Current=100mA, Forward Voltage=3.1V, Lens Color=Colorless, Manufacturer="Wurth Electronics", Max Operating Temperature=85°C, Max Reverse Voltage (DC)=5V, Min Operating Temperature=-40°C, Package Quantity=1, Power Dissipation=105mW, Supplier Part Number=732-4997-1-ND, Test Current=20mA, Case/Package=3528, Category=LEDs, ComponentLink1Description=https://datasheet.ciiva.com/23843/150141gs73100-23843266.pdf?src-supplier=Newark, ComponentLink1URL=https://datasheet.ciiva.com/23843/150141gs73100-23843266.pdf?src-supplier=Newark, ComponentLink2Description=https://datasheet.ciiva.com/29278/759463-da-01-en-smd-topled-einf-gruen-150141gs73100-29278953.pdf?src-supplier=Conrad, ComponentLink2URL=https://datasheet.ciiva.com/29278/759463-da-01-en-smd-topled-einf-gruen-150141gs73100-29278953.pdf?src-supplier=Conrad, ComponentLink3Description=https://datasheet.ciiva.com/22656/1911484-22656997.pdf?src-supplier=Element14, ComponentLink3URL=https://datasheet.ciiva.com/22656/1911484-22656997.pdf?src-supplier=Element14, ComponentLink4Description=https://datasheet.ciiva.com/48430/150141gs73100-eng-tds-48430060.pdf?src-supplier=Distrelec, ComponentLink4URL=https://datasheet.ciiva.com/48430/150141gs73100-eng-tds-48430060.pdf?src-supplier=Distrelec, ComponentLink5Description=https://datasheet.ciiva.com/29563/150141gs73100-29563029.pdf?src-supplier=Digikey, ComponentLink5URL=https://datasheet.ciiva.com/29563/150141gs73100-29563029.pdf?src-supplier=Digikey, ComponentLink6Description=https://datasheet.ciiva.com/29563/150141gs73100-29563030.pdf?src-supplier=Digikey, ComponentLink6URL=https://datasheet.ciiva.com/29563/150141gs73100-29563030.pdf?src-supplier=Digikey, Dominant Wavelength=525nm, Height=1.9mm, Lead Free="Lead Free", Length=3.5mm, Lens Size=2.4mm, Lens Style="Clear, Round", Lens Transparency=Clear, Luminous Intensity=1cd, Manufacturer Part Number=150141GS73100, Mount="Surface Mount", Mounting Technology="Surface Mount", NexarPartId=29717794, Packaging="Tape and Reel", Peak Wavelength=515nm, Pricing="1=0.17, 50=0.1684, 100=0.1467, 500=0.115 (USD)", REACH SVHC=Unknown, Reach SVHC Compliant=Unknown, Reverse Voltage=5V, RoHS=Compliant, RoHS Compliant=Yes, Series=WL-SMTW, Stock=36143, Supplier=Digikey, Viewing Angle=120°, Wavelength=525nm, Width=2.8mm
D12 D13: library part CMP-2000-06630-2, "LED RED CLEAR CHIP SMD R/A", Case Code (Imperial)=0603, Case Code (Metric)=1608, Color=Red, Forward Current=30mA, Forward Voltage=2V, Lens Color=Colorless, Manufacturer="Vishay Lite-On", Max Operating Temperature=85°C, Max Power Dissipation=75mW, Min Operating Temperature=-55°C, Package Quantity=1, Reverse Voltage=5V, Supplier Part Number=160-1479-1-ND, Test Current=20mA, Case/Package=0603, Category=LEDs, ComponentLink1Description=https://datasheet.ciiva.com/11775/0900766b80dc0b8e-11775445.pdf?src-supplier=Rs, ComponentLink1URL=https://datasheet.ciiva.com/11775/0900766b80dc0b8e-11775445.pdf?src-supplier=Rs, ComponentLink2Description=https://datasheet.ciiva.com/12400/ltst-s270krkt-201849-12400833.pdf?src-supplier=Mouser, ComponentLink2URL=https://datasheet.ciiva.com/12400/ltst-s270krkt-201849-12400833.pdf?src-supplier=Mouser, ComponentLink3Description=https://datasheet.ciiva.com/2110/ltst-s270krkt-2110021.pdf?src-supplier=Digikey, ComponentLink3URL=https://datasheet.ciiva.com/2110/ltst-s270krkt-2110021.pdf?src-supplier=Digikey, ComponentLink4Description=https://datasheet.ciiva.com/16387/p-100-ltst-s270krkt-16387507.pdf?src-supplier=Future+Electronics, ComponentLink4URL=https://datasheet.ciiva.com/16387/p-100-ltst-s270krkt-16387507.pdf?src-supplier=Future+Electronics, ComponentLink5Description=https://datasheet.ciiva.com/2110/s-110-ltst-s270krkt-2110023.pdf?src-supplier=Digikey, ComponentLink5URL=https://datasheet.ciiva.com/2110/s-110-ltst-s270krkt-2110023.pdf?src-supplier=Digikey, ComponentLink6Description=https://datasheet.ciiva.com/2110/s-110-ltst-s270krkt-2110022.pdf?src-supplier=Digikey, ComponentLink6URL=https://datasheet.ciiva.com/2110/s-110-ltst-s270krkt-2110022.pdf?src-supplier=Digikey, Depth=0.6mm, Dominant Wavelength=631nm, Height=0.6mm, Illumination Color=Red, Lead Free="Lead Free", Length=1.6mm, Lens Size=0.6mm, Lens Style=Diffused, Lens Transparency=Clear, Luminous Intensity=54mcd, Manufacturer Part Number=LTST-S270KRKT, Mount="Surface Mount", Mounting Technology="Surface Mount", Number of Elements=1, Number of LEDs=1, Number of Pins=2, Packaging="Tape and Reel", Pins=2, Power Dissipation=75mW, Power Rating=75mW, Pricing="1=0.24, 10=0.133, 100=0.0617, 500=0.05696, 1000=0.04462, 2000=0.04367 (USD)", Radiation Hardening=No, RoHS=Yes, RoHS Compliant=Yes, Series=-, Stock=83540, Supplier=Digikey, Viewing Angle=130°, Wavelength=639nm, Width=1.15mm
DS1: library part CMP-2000-06628-1, "LED Green, 75 mW, 30 mA, -30 to 85 degC, 2-Pin SMD, RoHS, Tape and Reel", Emitting Color=YellowGreen, Forward Current=30mA, Forward Voltage=2.4V, Manufacturer=Lite-On, Operating Temp Range=-55Cto85C, Operating Temperature Classification=Industrial, Package Description="2-Pin Surface Mount Device, Body 2.15 x 0.6 mm", Package Reference=S220KGKT, Package Type=ChipLed, Power Dissipation=75W, Reverse Voltage=5V, Test Current (It)=20mA, Chip Material=AlGaInP, Datasheet URL=http://optoelectronics.liteon.com/upload/download/DS22-2000-075/S_110_LTST-S220KGKT.pdf, Datasheet Version="Rev. D, 12/2013", DELETED=Compliant, Dominant Wave Length=571nm, High Brightness=Yes, Lens Dimensions=1.7x0.6x0.5mm, Lum Intensity=35mcd, Luminous Intensity=35mcd, Main Category=ChipLED, Manufacturer URL=http://www.us.liteon.com/, Mounting=SurfaceMount, Mounting Technology=SurfaceMount, Number of  Elements=1, Packaging=TapeandReel, Peak Wavelength=574nm, Pin Count=2, Product Depth (mm)=0.6mm, Product Height (mm)=1mm, Product Length (mm)=2.1mm, Rad Hardened=No, Shape Type=Rectangular, Type=Uni-Color, Viewing Angle=130deg
J1: "FFC & FPC Connectors Zero Insertion Force Connector for FFC, 0.50 mm (.0197) Pitch", Actuator Color=Black, Housing Color=Natural, Manufacturer=Samtec, Max Current Rating=1.4A, Max Operating Temperature=105°C, Min Operating Temperature=-55°C, Supplier Part Number=SAM10388-ND, Actuator Material="Polymer,Liquid Crystal Polymer", Category="FFC / FPC", ComponentLink1Description=http://www.farnell.com/datasheets/2607237.pdf?src-supplier=Farnell, ComponentLink1URL=http://www.farnell.com/datasheets/2607237.pdf?src-supplier=Farnell, ComponentLink2Description=http://components.arrow.com/part/dataview/51417210S9388675N1004?src-supplier=Arrow+Electronics, ComponentLink2URL=http://components.arrow.com/part/dataview/51417210S9388675N1004?src-supplier=Arrow+Electronics, ComponentLink3Description=http://www.farnell.com/datasheets/2607237.pdf?src-supplier=Newark, ComponentLink3URL=http://www.farnell.com/datasheets/2607237.pdf?src-supplier=Newark, ComponentLink4Description=http://www.samtec.com/documents/webfiles/pdf/zf5s.pdf?src-supplier=Avnet, ComponentLink4URL=http://www.samtec.com/documents/webfiles/pdf/zf5s.pdf?src-supplier=Avnet, ComponentLink5Description=http://suddendocs.samtec.com/prints/zf5s-xx-xx-x-wt-x-xx-mkt.pdf?src-supplier=Digikey, ComponentLink5URL=http://suddendocs.samtec.com/prints/zf5s-xx-xx-x-wt-x-xx-mkt.pdf?src-supplier=Digikey, Contact Material=Bronze, Contact Plating=Tin, Depth=5.66mm, Housing Material=Polymer, Length=13.15mm, Manufacturer Part Number=ZF5S-15-01-T-WT, Mounting Technology="Surface Mount", Number of Contacts=15, Number of Positions=15, Number of Rows=1, Orientation="Right Angle", Packaging=Rail/Tube, Pitch=0.5mm, Pricing="1=2.37, 50=1.93, 100=1.64, 500=1.46, 1000=1.2763 (USD)", Radiation Hardening=No, RoHS=Yes, RoHS Compliant=Yes, Series=ZF5S, Stock=265, Supplier=Digikey, Supplier 1=Digikey, Supplier Part Number 1=SAM10388-ND, Termination=Solder, Wire/Cable Type=Straight
L1: "6.0x6.0x2.8 10uH ±20% DCR=94mΩ 1.95A SRF=23MHz 应用:电源", Manufacturer=Sunlord, Supplier Part Number=3442-SWPA6028S100MTCT-ND, Supplier Part Number 1=3442-SWPA6028S100MTDKR-ND, Manufacturer Part Number=SWPA6028S100MT, Pricing="1=0.69, 10=0.571, 100=0.4693, 1000=0.38596 (USD)", RoHS=No, Stock=912, Supplier=Digikey, Supplier 1=Digikey
R1: library part CMP-2100-03674-1, "Chip Resistor, 100 KOhm, +/- 1%, 0.25 W, -55 to 155 degC, 1206 (3216 Metric), RoHS, Tape and Reel", Case Code (Imperial)=1206, Case Code (Metric)=3216, Manufacturer=Yageo, Max Operating Temperature=155degC, Min Operating Temperature=-55degC, Package Description="2-Pin Surface Mount Device, Body 3.1 x 1.6 mm", Package Reference=1206.0, Power Rating=250mW, Resistance=100KOhm, Temperature Coefficient=100ppm/degreesC, Tolerance=1%, Voltage Rating=200V, Case/Package=1206, Composition=ThickFilm, Datasheet URL=http://www.yageo.com/NewPortal/yageodocoutput?fileName=/pdf/R-Chip/PYu-RC_Group_51_RoHS_L_5.pdf, Datasheet Version="Rev. 5, 10/2016", Depth=1.6mm, Height=0.55mm, Lead Free=LeadFree, Length=3.1mm, Manufacturer URL=http://www.yageo.com/, Packaging=TapeandReel, REACH SVHC=NoSVHC, RoHSCompliant=true, Termination=SMD/SMT
R2: library part CMP-03412-020064-2, "RES 160kΩ ±1% 0.063W 0402", Case Code (Imperial)=0402, Case Code (Metric)=1005, Manufacturer=Yageo, Max Operating Temperature=155°C, Max Power Dissipation=63mW, Min Operating Temperature=-55°C, Resistance=160kR, Resistor Type="Thick Film", Supplier Part Number=YAG5635CT-ND, Temperature Coefficient=100ppm/°C, Tolerance=1%, Voltage Rating=50V, Case/Package=0402, Category="Chip SMD Resistors", ComponentLink1Description=https://datasheet.octopart.com/AC0402FR-07160KL-Yageo-datasheet-166720450.pdf?src-supplier=Future+Electronics, ComponentLink1URL=https://datasheet.octopart.com/AC0402FR-07160KL-Yageo-datasheet-166720450.pdf?src-supplier=Future+Electronics, ComponentLink2Description=https://www.yageo.com/upload/media/product/productsearch/datasheet/rchip/PYu-AC_51_RoHS_L_7.pdf?src-supplier=Digikey, ComponentLink2URL=https://www.yageo.com/upload/media/product/productsearch/datasheet/rchip/PYu-AC_51_RoHS_L_7.pdf?src-supplier=Digikey, ComponentLink3Description=http://www.yageo.com/NewPortal/yageodocoutput?fileName=/pdf/R-Chip/PYu-AC_51_RoHS_L_6.pdf&src-supplier=Digikey, ComponentLink3URL=http://www.yageo.com/NewPortal/yageodocoutput?fileName=/pdf/R-Chip/PYu-AC_51_RoHS_L_6.pdf&src-supplier=Digikey, Features="Moisture Resistant", Height=0.015inch, Length=0.039inch, Manufacturer Part Number=AC0402FR-07160KL, Number of Terminations=2, Packaging="Tape and Reel", Pricing="1=0.1, 10=0.009, 100=0.0071, 1000=0.0051, 2500=0.00407 (USD)", RoHS=Yes, RoHS Compliant=Yes, Series=AC, Stock=26014, Supplier=Digikey, Width=0.02inch
R4 R5: library part CMP-2002-03808-1, Case Code (Imperial)=0402, Case Code (Metric)=1005, Manufacturer="KOA Speer", Max Operating Temperature=155°C, Max Power Dissipation=100mW, Min Operating Temperature=-55°C, Package Quantity=10000, Power Rating=63mW, Ratings=AEC-Q200, Supplier Part Number=2019-RK73H1ETTP1001FCT-ND, Temperature Coefficient=100ppm/°C, Tolerance=1%, Voltage Rating=50V, Case/Package=0402, Category="Chip SMD Resistors", ComponentLink1Description=https://datasheet.ciiva.com/5554/rk73h-5554172.pdf?src-supplier=Mouser, ComponentLink1URL=https://datasheet.ciiva.com/5554/rk73h-5554172.pdf?src-supplier=Mouser, Construction=Rectangular, Depth=0.5mm, Features="Moisture Resistant,Automotive AEC-Q200", Height=0.35mm, Lead Free=5697LeadFree, Length=1mm, Manufacturer Part Number=RK73H1ETTP1001F, Military Standard=Not, Mounting Technology="Surface Mount", Number of Terminations=2, Packaging="Tape and Reel", Part Number=RK73H1ETTP1001F, Pricing="1=0.1, 10=0.021, 50=0.0134, 100=0.0112, 500=0.00764, 1000=0.00658, 5000=0.00478 (USD)", RoHS=Yes, RoHS Compliant=Yes, Series=RK73H, Stock=1021606, Supplier=Digikey, Technology="THICK FILM", Termination=SMD/SMT, Voltage Rating (DC)=50V, Width=0.5mm
U1: "RISC Microcontroller, 32-Bit, FLASH, CORTEX-M4F CPU, 180MHz, CMOS, PBGA216", Clock Frequency=2.4GHz, Manufacturer=STMicroelectronics, Max Operating Temperature=85°C, Max Supply Voltage=3.6V, Min Operating Temperature=-40°C, Min Supply Voltage=1.71V, Supplier Part Number=497-STM32WB5MMGH6CT-ND, Category=Microcontrollers, Data Rate=2Mbps, Height=1.428mm, Interface=39,40,224,1519,1532,1533,4268Interface, Manufacturer Part Number=STM32WB5MMGH6TR, Number of GPIO=68NUMBER, Pricing="1=12.14, 10=9.532, 25=8.8804, 100=8.1641, 250=7.8228, 500=7.61702 (USD)", RoHS=No, Stock=5514, Supplier=Digikey, Supplier 1=Digikey, Supplier Part Number 1=497-STM32WB5MMGH6CT-ND
U2: "Optical Afe For Health Monitorin", Supplier Part Number 1=505-ADPD1080WBCPZR7CT-ND, Supplier 1=Digikey
U3: library part CMP-0246-00392-2, "IC REG BOOST ADJ 400MA TSOT23-5", Case/Package=SOT-23-5, Manufacturer=Maxim, Max Input Voltage=5.5V, Max Operating Temperature=85°C, Max Output current=150mA, Min Input Voltage=800mV, Min Operating Temperature=-40°C, Min Output Voltage=2V, Package Quantity=1, Supplier Part Number=MAX1722EZK+TCT-ND, Category="Voltage Regulators - Switching", ComponentLink1Description=https://datasheet.ciiva.com/2028/max1722-max1724-2028357.pdf?src-supplier=Digikey, ComponentLink1URL=https://datasheet.ciiva.com/2028/max1722-max1724-2028357.pdf?src-supplier=Digikey, ComponentLink2Description=https://datasheet.ciiva.com/2028/max1722-max1724-2028358.pdf?src-supplier=Digikey, ComponentLink2URL=https://datasheet.ciiva.com/2028/max1722-max1724-2028358.pdf?src-supplier=Digikey, ComponentLink3Description=https://datasheet.ciiva.com/2028/max1722-max1724-2028359.pdf?src-supplier=Digikey, ComponentLink3URL=https://datasheet.ciiva.com/2028/max1722-max1724-2028359.pdf?src-supplier=Digikey, Efficiency=90%, Lead Free="Lead Free", Manufacturer Part Number=MAX1722EZK+T, Max Output Voltage=5.5V, Mount="Surface Mount", Number of Outputs=1, Number of Pins=5, Operating Supply Voltage=5.5V, Output Current=150mA, Output Type=Adjustable, Output Voltage=5.5V, Packaging="Tape and Reel", Pricing="1=6.07, 10=4, 25=3.46, 100=2.8487, 250=2.54868, 500=2.36412, 1000=2.325 (USD)", Radiation Hardening=No, RoHS=Yes, RoHS Compliant=Yes, Series=-, Stock=3635, Supplier=Digikey, Synchronous Rectifier=Yes, Topology=Boost
U4: library part CMP-2000-07467-2, "IMU ACCEL/GYRO I2C/SPI 14LGA", Manufacturer=STMicroelectronics, Max Supply Voltage=3.6V, Min Supply Voltage=1.62V, Operating Supply Current=0.29-0.65mA, Package=LGA-14L-DM00249496, Temperature="-40°C to +85°C", Temperature Range High=+85°C, Temperature Range Low=-40°C, Accel Range=2/4/8/16g, Automotive=No, Category=IC, ComponentLink2Description=Datasheet, ComponentLink2URL=https://www.st.com/resource/en/datasheet/lsm6dsl.pdf, Device Class L1=Sensors, Device Class L2="Motion Sensors", Device Class L3="Inertial Measurement Units (IMUs)", Digikey Description="IMU ACCEL/GYRO I2C/SPI 14LGA", Footprint Url=https://www.st.com/resource/en/technical_note/cd00134799.pdf, Gyro Range=125/250/500/1000/2000°/s, Height=0.86mm, Lead Free=Yes, Manufacturer Part Number=LSM6DSLTR, Mouser Description="iNEMO inertial module: always-on 3D accelerometer and 3D gyroscope", Octopart=https://octopart.com/lsm6dsltr-stmicroelectronics-66358193, Resolution=16bits, RoHS=TRUE, Sensor Output=I2C,SPI, Sensor Type=Temperature,Accelerometer,Gyroscope
U5 U6: library part CMP-0244-00332-1, "200mA, Low Noise Low Drop Voltage Regulator with Shutdown Function, 1.8V, 5-Pin SOT23-5L, Tape and Reel", Manufacturer=STMicroelectronics, Supplier Part Number=497-7811-1-ND, Category="Voltage Regulators - Linear", ComponentLink1Description="Manufacturer URL", ComponentLink1URL=http://www.st.com, ComponentLink2Description=Datasheet, ComponentLink2URL=http://www.st.com/internet/com/TECHNICAL_RESOURCES/TECHNICAL_LITERATURE/DATASHEET/CD00002558.pdf, ComponentLink3Description=https://datasheet.ciiva.com/3225/cd00002558-3225210.pdf?src-supplier=Avnet, ComponentLink3URL=https://datasheet.ciiva.com/3225/cd00002558-3225210.pdf?src-supplier=Avnet, ComponentLink4Description=https://datasheet.ciiva.com/2042/cd00002558-2042967.pdf?src-supplier=Digikey, ComponentLink4URL=https://datasheet.ciiva.com/2042/cd00002558-2042967.pdf?src-supplier=Digikey, ComponentLink5Description=https://datasheet.ciiva.com/2042/cd00002558-2042968.pdf?src-supplier=Digikey, ComponentLink5URL=https://datasheet.ciiva.com/2042/cd00002558-2042968.pdf?src-supplier=Digikey, ComponentLink6Description=https://datasheet.ciiva.com/2042/cd00002558-2042969.pdf?src-supplier=Digikey, ComponentLink6URL=https://datasheet.ciiva.com/2042/cd00002558-2042969.pdf?src-supplier=Digikey, DatasheetVersion=10/07/2008, Manufacturer Part Number=LK112SM18TR, PackageDescription="5-Pin SOT-23 Package, 2.9 x 1.6 mm Body, 0.95 mm Pitch, 2.8 mm Lead Span", PackageReference=SOT23-5L, PackageVersion=1/01/2008, Pricing="1=0.91, 10=0.653, 25=0.588, 100=0.5172, 250=0.4834, 500=0.46302, 1000=0.44623 (USD)", RoHS=Yes, Stock=1322, Supplier=Digikey
U7: library part CMP-12184-000002-1, "LOW-VOLTAGE, ULTRA-LOW-POWER, 0.", Manufacturer=STMicroelectronics, Max Supply Voltage=3.6V, Min Supply Voltage=1.5V, Operating Supply Current=1.75-120uA, Package=UDFN-6L-DM00423052, Temperature="-40°C to +125°C", Temperature Range High=+125°C, Temperature Range Low=-40°C, Automotive=No, Category=IC, ComponentLink2Description=Datasheet, ComponentLink2URL=https://www.st.com/resource/en/datasheet/stts22h.pdf, Device Class L1=Sensors, Device Class L2="Temperature and Humidity Sensors", Device Class L3=unset, Digikey Description="LOW-VOLTAGE, ULTRA-LOW-POWER, 0.", Height=0.55mm, Interface=I2C,SMBus, Lead Free=Yes, Manufacturer Part Number=STTS22HTR, Mouser Description="Low-voltage, ultra-low-power, 0.5 ï¿½C accuracy Iï¿½C/SMBus 3.0 temperature sensor", Octopart=https://octopart.com/stts22htr-stmicroelectronics-103417944, Resolution=16bits, RoHS=TRUE, Sensor Output=I2C,SMBus, Standoff Height=0mm

## Free pads (board coordinates)
  round 78.74 hole 39.37: 10(4627.85,3164.72) 10(4680,3065)
  round 30 smd far side: 15(4059,3563)
  round 30 hole 90.55: 16(4065,3095) 16(4925,3691)

## Via types
v1: diameter 26, hole 14, Top Layer to Bottom Layer, tented top, 22 vias
v2: diameter 31.5, hole 15.75, Top Layer to Bottom Layer, tented top, 16 vias
v3: diameter 26, hole 14, Top Layer to Bottom Layer, 5 vias
v4: diameter 26, hole 14, Top Layer to Bottom Layer, tented both sides, 4 vias
v5: diameter 31.5, hole 15.75, Top Layer to Bottom Layer, tented both sides, 3 vias
v6: diameter 26, hole 15.75, Top Layer to Bottom Layer, tented top, 3 vias
v7: diameter 59.06, hole 43.31, Top Layer to Bottom Layer, tented top, 2 vias
v8: diameter 59.06, hole 39.37, Top Layer to Bottom Layer, tented top, 1 vias
v9: diameter 24, hole 14, Top Layer to Bottom Layer, tented top, 1 vias
v10: diameter 26, hole 15.75, Top Layer to Bottom Layer, 1 vias
v11: diameter 39.37, hole 15.75, Top Layer to Bottom Layer, tented top, 1 vias

## Nets (pads, with @x,y where several pads share a name; then routed paths per layer and width w, separated by ;. In a path a pad name is that pad's centre, name@x,y a point inside that pad or via, vN(x,y) a via of type N, cw(c..) or ccw(c..) an arc to the next point about the centre after c; other vN are vias at no path point)
1.8AVDD: C9.1 U2.6 U5.4 | length 437.1
  Top Layer w11.81: U5.4@4356.38,3896.07 4356.38,3884.26 4364.25,3876.39 4418.61,3876.39 4498,3797 4535,3797 4560.17,3771.83 v5(4560.17,3709.69)
  Bottom Layer w7.87: U2.6@4529.02,3759.9 4578.03,3759.9 cw(c4578.03,3753.67) 4584.26,3753.67 C9.1@4584.26,3741.15
  Bottom Layer w11.81: v5(4560.17,3709.69) 4579.93,3729.46 4579.93,3736.82 C9.1@4584.26,3741.15
1.8DVDD: C13.1 U2.3 U6.4 | length 204
  Top Layer w11.81: C13.1@4524.76,3872.32 4524.9,3872.46 4556.59,3872.46 4556.73,3872.59 4561.57,3872.59 4595.41,3838.75 4595.41,3813.99 U6.4@4603.29,3806.12
  Bottom Layer w7.87: U2.3@4529.02,3807.14 4581.14,3807.14 ccw(c4581.14,3827) v2(4601,3827)
3V3: C3.1 C5.1 C6.1 C7.1 D4.2 D9.2 D12.2 DS1.1 J1.09 R1.2 U1.4 U1.6 U1.15 U1.17 U1.32 U3.4 U4.5 U4.8 U7.3 | length 1376.2
  Top Layer w7.87: U1.4@3950.46,3511.45 3947.51,3509.56 3943.57,3509.56 ccw(c3943.57,3499.63) 3933.65,3499.63 3933.65,3487.82 ccw(c3943.57,3487.82) 3943.57,3477.9 3947.51,3477.9 U1.6@3950.46,3476.01 3951.32,3476.87 3980.81,3476.87 v1(3981.67,3477.74) ; U1.32@4200.46,3298.85 4201.45,3299.83 4209.57,3299.83 4217.27,3307.53 4229.59,3307.53 v1(4233.06,3311) ; v4(4471.14,3165.2) 4471.1,3371.22 cw(c4519.25,3371.22) D12.2@4519.25,3419.37
  Top Layer w9.84: U1.17@3950.46,3280.15 3949.28,3281.33 3936.67,3281.33 3924.09,3293.91 3924.09,3306.91 v1(3921,3310) 3925.37,3310 3931.94,3316.56 U1.15@3950.46,3316.56
  Top Layer w11.81: v1(4233.06,3311) 4259.58,3284.49 U4.8@4259.58,3201.43 4299.08,3201.43 4306,3194.51 4306,3141.92 4299.08,3135 4266.95,3135 cw(c4266.95,3135.97) U4.5@4265.97,3135.97 ; v1(4475,2925) ccw(c4475,2925.95) 4475.95,2925.95 J1.09@4475.95,2978.25
  Top Layer w19.68: R1.2@4601.55,3687.07 4601.55,3605.45 ccw(c4606.08,3605.45) v1(4606.08,3600.93)
  Bottom Layer w11.81: v1(4233.06,3311) 4258.31,3285.75 4260.22,3283.84 ccw(c4539.62,3379.89) 4277,3244.54 4277,3227.45 U7.3@4234.59,3185.04
  Bottom Layer w15.75: v1(4233.06,3311) 4233.06,3435.9 4228.51,3440.45 4228.51,3513.04 DS1.1@4234.15,3518.69
  Bottom Layer w19.68: v1(3981.67,3477.74) v1@3981.67,3476.03 ; C5.1@3989.25,3515 3988.86,3514.61 3988.64,3514.61 3977.11,3503.07 3977.11,3484.01 3981.67,3479.45 v1@3981.67,3476.03 ; C3.1@4004.83,3430.46 4001.96,3430.46 3991.87,3440.55 3991.87,3440.97 3978.78,3454.07 3978.78,3473.13 v1@3981.67,3476.03
  other v1: 4559.91,3600.45 4668.73,3602.34
Bat: 
ECGint1: J1.02 U1.39 | length 584.4
  Top Layer w6.69: U1.39@4200.46,3422.86 4250.72,3422.86 cw(c4250.72,3322.86) 4321.43,3393.57 4335.71,3379.29
  Top Layer w7: 4335.71,3379.29 4374.56,3340.43 cw(c4342.13,3308) 4388,3308 4388,3146.04 cw(c4329.96,3146.04) 4371,3105 ccw(c4424.11,3051.89) 4349,3051.89 4349,3022.86 cw(c4342,3022.9) 4346.25,3017.34 ccw(c4351.94,3009.75) 4342.45,3009.75 4342.45,2984.67 cw(c4335.45,2984.71) 4342.04,2982.33 4340.56,2982.33 J1.02@4338.16,2978.25
ECGint2: J1.03 U1.40 | length 627.7
  Top Layer w6.69: U1.40@4200.46,3440.58 4253,3440.58 cw(c4253,3340.58) 4323.71,3411.29 4345.71,3389.29 ; J1.03@4358.17,2981.86 J1.03@4360.38,3006.11
  Top Layer w7: 4345.71,3389.29 4372.67,3362.33 ; J1.03@4357.84,2978.25 J1.03@4360.25,2981 ; J1.03@4360.28,2981 ccw(c4335.74,3000.36) 4360.76,2981.62 ccw(c4355.14,2985.79) 4362.14,2985.75 4362.14,3006.11 4362.14,3006.63 4362.14,3009.75 cw(c4371.62,3009.75) 4364.96,3016.49 ccw(c4360,3021.44) 4367,3021.4 4367,3058.54 cw(c4374,3058.54) 4367.71,3061.62 4393.75,3114.81 ccw(c4329.96,3146.04) 4399.13,3129.93 4401.82,3141.45 ccw(c4395,3143.04) 4402,3143.04 4402,3291.58 ccw(c4395,3291.58) 4401.99,3291.98 4400.89,3311.34 ccw(c4342.13,3308) 4386.26,3346.94 4372.97,3362.01 ccw(c4367.72,3357.38) 4372.68,3362.32
ECGint3: J1.04 U1.41 | length 626.1
  Top Layer w6.69: U1.41@4200.46,3458.3 4260.28,3458.3 cw(c4260.28,3358.3) 4330.99,3429.01 4354.3,3405.7 ; J1.04@4377.53,2978.25 4380.09,3006.38 4384.02,3047.36 4385.36,3061.31 4385.42,3061.93 cw(c4445.87,3056.13) 4385.45,3062.28
  Top Layer w7: 4354.3,3405.7 4384.66,3375.34 ; 4384.69,3375.31 cw(c4379.68,3370.42) 4385.63,3374.11 4403.15,3345.91 cw(c4342.13,3308) 4413.86,3312 4414.95,3292.71 cw(c4395,3291.58) 4414.98,3291.58 4414.98,3143.04 cw(c4343.96,3143.04) 4407.55,3111.41 4389.52,3075.16 ccw(c4395.76,3072) 4389.28,3074.63 ccw(c4395.76,3072) 4389.06,3074.01 4385.6,3062.34 4385.58,3062.27 ccw(c4392.29,3060.3) 4385.42,3061.63 4385.36,3061.31
ECGint4: J1.05 U1.42 | length 655.5
  Top Layer w6.69: U1.42@4200.46,3476.01 4267.57,3476.01 cw(c4267.57,3376.01) 4338.28,3446.72 4355.39,3429.61 ; J1.05@4397.21,2978.25 cw(c4404.97,2986.01) 4394,2986.01 4394,2991.28 4397.97,3050.94 cw(c4427,3049) 4398.03,3051.68
  Top Layer w7: 4355.39,3429.61 4399.42,3385.58 cw(c4332.85,3319) 4427,3319 ccw(c4446.52,3319) 4427.01,3318.26 4427.87,3296.54 ; 4397.97,3050.94 4397.97,3051.68 4397.97,3056.13 cw(c4404.97,3056.13) 4398.5,3058.81 4410.45,3087.68 cw(c4416.93,3085.03) 4412.01,3090.01 ccw(c4375.79,3126.21) 4427,3126.21 cw(c4434,3126.21) 4427.02,3126.71 4427.76,3137.07 ccw(c4343.96,3143.04) 4427.97,3143.04 4427.97,3291.58 ccw(c4302,3291.58) 4427.87,3296.51
ECGint5: J1.08 U1.48 | length 785.7
  Top Layer w5.98: U1.48@4181.76,3565.58 4181.76,3574.77 cw(c4196.23,3574.77) 4186,3585 cw(c4193.24,3577.76) 4193.24,3588 4215,3588 cw(c4215,3574) 4229,3574 ccw(c4272.46,3574) 4241.73,3543.27 4278.46,3506.54 ccw(c4287,3515.07) 4287,3503
  Top Layer w6.69: 4287,3503 cw(c4287,3454.72) 4321.14,3488.86 4345.39,3464.61 cw(c4340.63,3459.91) 4345.59,3464.4 4412.19,3390.76 cw(c4332.85,3319) 4439.83,3319 ccw(c4446.52,3319) 4439.84,3318.74 4440.69,3297.05 cw(c4302,3291.58) 4440.73,3295.88 4444.81,3164.39 ccw(c4471.14,3165.2) 4449.41,3150.32 4454.48,3142.91 ccw(c4460,3146.69) 4460,3140 cw(c4460,3118.27) 4475.36,3133.64 cw(c4452.1,3110.37) 4485,3110.37 4485,3068.04 cw(c4426.96,3068.04) 4467.98,3026.98 ccw(c4496.51,2998.49) 4464.46,3022.95 ccw(c4469.76,3018.87) 4463.34,3020.76 4456.54,2997.67 ccw(c4462.96,2995.78) 4456.27,2995.78 J1.08@4456.27,2978.25
Electrode: J1.11 | length 406.3
  Top Layer w7.87: J1.11@4515.32,2978.25 4515.32,2924.68 ccw(c4517,2924.68) v1(4517,2923)
  Bottom Layer w8: v1(4517,2923) 4809,2923 ccw(c4809,2960) v8(4846,2960)